# EAGLE board psas_c3 (EAGLE 7.3.0)
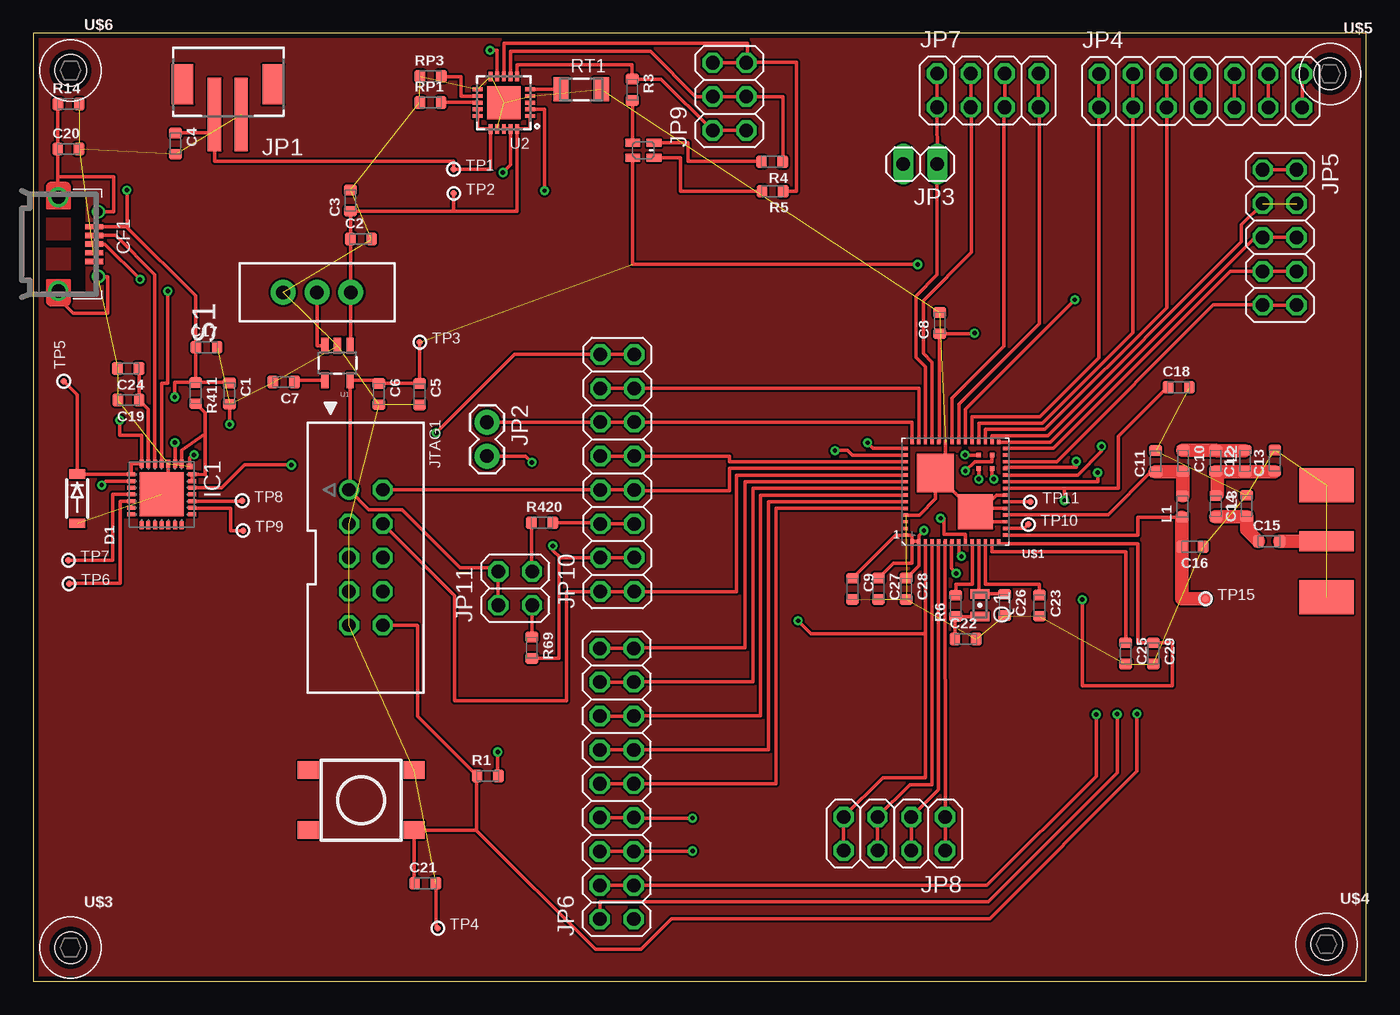
[diagram p0: board, top side]
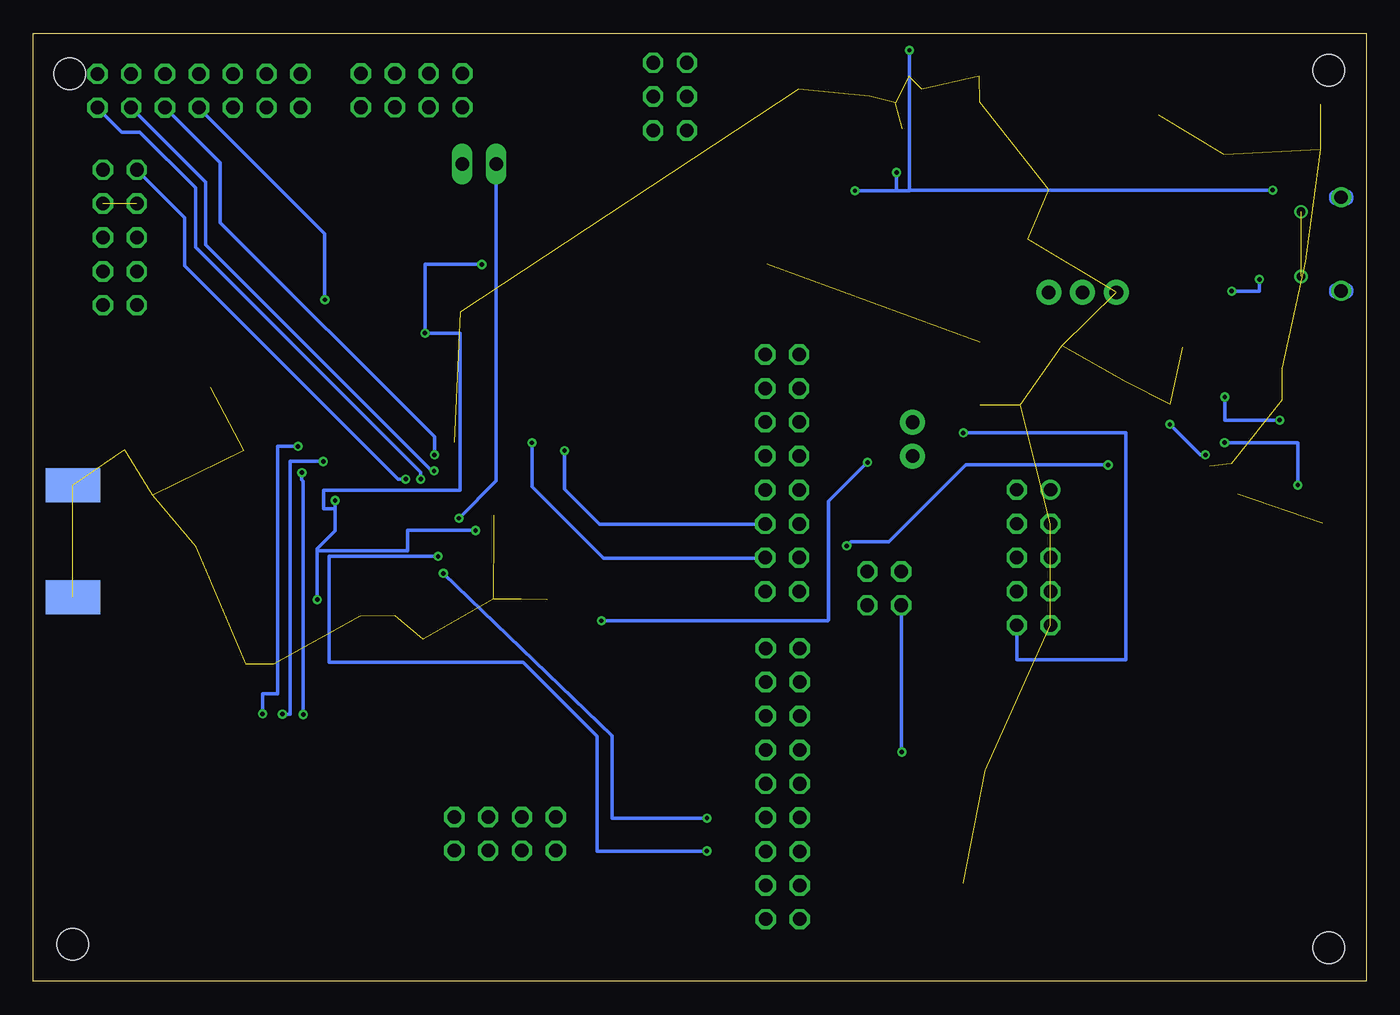
[diagram p1: board, bottom side, seen from below]

Size 100 x 71.11 mm. Coordinates in mm from the lower left corner, seen from the top.
Outline: 0,0 100,0 100,71.11 0,71.11 0,0
Copper layers (1*16): Top 0.0356mm / dielectric 1.5011mm / Bottom 0.0356mm
Design rules "LaenPCBOrder": minimum track width 6mil, minimum drill 13mil, track to track 6mil, track to pad 6mil, pad to pad 6mil, via to via 6mil, smd to smd 6mil, copper to edge 15mil, drill to drill 6mil, minimum pad ring 7mil, minimum via ring 7mil, stop-mask expansion 3mil, vias tented up to drill 0mil, thermal gap 10mil

## Footprints (pad centres in the part's own frame; a part is rotated, then mirrored left to right if it is on the bottom)
.0603-B-NOSILK = smd 0.8 x 0.95: 1 -0.8,0; 2 0.8,0
USB-MICRO-B-PTH-HIROSE = smd 0.4 x 1.35: 1 -1.3,2.675; 2 -0.65,2.675; 3 0,2.675; 4 0.65,2.675; 5 1.3,2.675 | drill 1: S1 -3.513,0; S2 3.513,0 | drill 0.65 pad 0.94: S3 2.425,3; S4 -2.425,3
SOD-123 = smd 0.7 x 1.2: ANODE 1.85,0; CATHODE -1.85,0
MLP28 = smd 0.6 x 0.3: 1 -2.3,1.5; 2 -2.3,1; 3 -2.3,0.5; 4 -2.3,0; 5 -2.3,-0.5; 6 -2.3,-1; 7 -2.3,-1.5; 15 2.3,-1.5; 16 2.3,-1; 17 2.3,-0.5; 18 2.3,0; 19 2.3,0.5; 20 2.3,1; 21 2.3,1.5 | smd 0.3 x 0.6: 8 -1.5,-2.3; 9 -1,-2.3; 10 -0.5,-2.3; 11 0,-2.3; 12 0.5,-2.3; 13 1,-2.3; 14 1.5,-2.3; 22 1.5,2.3; 23 1,2.3; 24 0.5,2.3; 25 0,2.3; 26 -0.5,2.3; 27 -1,2.3; 28 -1.5,2.3 | smd 3.3 x 3.3: EXP 0,0 | smd 0.435 x 0.435: M -2.103,2.103
SPARKFUN-CONNECTORS_JST-2-SMD-VERT = smd 1 x 5.5: GND 1,-2; VCC -1,-2 | smd 1.6 x 3: P$1 -3.4,0.27; P$2 3.4,0.27
1X02 = drill 1.016 pad 1.88: 1 0,0; 2 2.54,0
1X02' = drill 1.016 long: 1 -1.27,0; 2 1.27,0
2X07 = drill 1.016 octagon: 1 -7.62,-1.27; 2 -7.62,1.27; 3 -5.08,-1.27; 4 -5.08,1.27; 5 -2.54,-1.27; 6 -2.54,1.27; 7 0,-1.27; 8 0,1.27; 9 2.54,-1.27; 10 2.54,1.27; 11 5.08,-1.27; 12 5.08,1.27; 13 7.62,-1.27; 14 7.62,1.27
2X05 = drill 1.016 octagon: 1 -5.08,-1.27; 2 -5.08,1.27; 3 -2.54,-1.27; 4 -2.54,1.27; 5 0,-1.27; 6 0,1.27; 7 2.54,-1.27; 8 2.54,1.27; 9 5.08,-1.27; 10 5.08,1.27
2X09 = drill 1.016 octagon: 1 -10.16,-1.27; 2 -10.16,1.27; 3 -7.62,-1.27; 4 -7.62,1.27; 5 -5.08,-1.27; 6 -5.08,1.27; 7 -2.54,-1.27; 8 -2.54,1.27; 9 0,-1.27; 10 0,1.27; 11 2.54,-1.27; 12 2.54,1.27; 13 5.08,-1.27; 14 5.08,1.27; 15 7.62,-1.27; 16 7.62,1.27; 17 10.16,-1.27; 18 10.16,1.27
2X04 = drill 1.016 octagon: 1 -3.81,-1.27; 2 -3.81,1.27; 3 -1.27,-1.27; 4 -1.27,1.27; 5 1.27,-1.27; 6 1.27,1.27; 7 3.81,-1.27; 8 3.81,1.27
2X03 = drill 1.016 octagon: 1 -2.54,-1.27; 2 -2.54,1.27; 3 0,-1.27; 4 0,1.27; 5 2.54,-1.27; 6 2.54,1.27
2X08 = drill 1.016 octagon: 1 -8.89,-1.27; 2 -8.89,1.27; 3 -6.35,-1.27; 4 -6.35,1.27; 5 -3.81,-1.27; 6 -3.81,1.27; 7 -1.27,-1.27; 8 -1.27,1.27; 9 1.27,-1.27; 10 1.27,1.27; 11 3.81,-1.27; 12 3.81,1.27; 13 6.35,-1.27; 14 6.35,1.27; 15 8.89,-1.27; 16 8.89,1.27
2X02 = drill 1.016 octagon: 1 -1.27,-1.27; 2 -1.27,1.27; 3 1.27,-1.27; 4 1.27,1.27
CORTEXM3_SWD10_MOLEX = drill 1: 1 -5.08,-1.27 | drill 1 octagon: 2 -5.08,1.27; 3 -2.54,-1.27; 4 -2.54,1.27; 5 0,-1.27; 6 0,1.27; 7 2.54,-1.27; 8 2.54,1.27; 9 5.08,-1.27; 10 5.08,1.27
KINGBRITE_RGBLED_1.6X1.26 = smd 1.1 x 0.6: 1 0.8,-0.55; 2 -0.8,-0.55; 3 -0.8,0.55; 4 0.8,0.55
FC-12M = smd 0.7 x 1.4: 1 -0.85,0; 2 0.85,0
R1206 = smd 1.15 x 1.8: 1 -1.5,0; 2 1.5,0
SWITCH-SPDT = drill 1.016 pad 1.88: 1 0,2.54; 2 0,0; 3 0,-2.54
TACTILE_SWITCH_TALL = smd 1.55 x 1.3: A1 -3.975,-2.25; A2 3.975,-2.25; B1 -3.975,2.25; B2 3.975,2.25
TESTPOINT_ROUND_0.5MM = smd 0.5 x 0.5: P$1 0,0
SPARKFUN-POWERIC_SOT23-5 = smd 0.55 x 1.2: 1 -0.95,-1.3; 2 0,-1.3; 3 0.95,-1.3; 4 0.95,1.3; 5 -0.95,1.3
QFN20_4MM = smd 0.73 x 0.28: P$1 -1.965,1; P$2 -1.965,0.5; P$3 -1.965,0; P$4 -1.965,-0.5; P$5 -1.965,-1; P$11 1.965,-1; P$12 1.965,-0.5; P$13 1.965,0; P$14 1.965,0.5; P$15 1.965,1 | smd 0.28 x 0.73: P$6 -1,-1.965; P$7 -0.5,-1.965; P$8 0,-1.965; P$9 0.5,-1.965; P$10 1,-1.965; P$16 1,1.965; P$17 0.5,1.965; P$18 0,1.965; P$19 -0.5,1.965; P$20 -1,1.965 | smd 2.5 x 2.5: P$21 0,0
MKW01Z128 = smd 0.35 x 0.25: 1 -3.725,-3.25; 2 -3.725,-2.75; 3 -3.725,-2.25; 4 -3.725,-1.75; 5 -3.725,-1.25; 6 -3.725,-0.75; 7 -3.725,-0.25; 8 -3.725,0.25; 9 -3.725,0.75; 10 -3.725,1.25; 11 -3.725,1.75; 12 -3.725,2.25; 13 -3.725,2.75; 14 -3.725,3.25; 29 3.725,3.25; 30 3.725,2.75; 31 3.725,2.25; 32 3.725,1.75; 33 3.725,1.25; 34 3.725,0.75; 35 3.725,0.25; 36 3.725,-0.25; 37 3.725,-0.75; 38 3.725,-1.25; 39 3.725,-1.75; 40 3.725,-2.25; 41 3.725,-2.75; 42 3.725,-3.25 | smd 0.25 x 0.35: 15 -3.25,3.725; 16 -2.75,3.725; 17 -2.25,3.725; 18 -1.75,3.725; 19 -1.25,3.725; 20 -0.75,3.725; 21 -0.25,3.725; 22 0.25,3.725; 23 0.75,3.725; 24 1.25,3.725; 25 1.75,3.725; 26 2.25,3.725; 27 2.75,3.725; 28 3.25,3.725; 43 3.25,-3.725; 44 2.75,-3.725; 45 2.25,-3.725; 46 1.75,-3.725; 47 1.25,-3.725; 48 0.75,-3.725; 49 0.25,-3.725; 50 -0.25,-3.725; 51 -0.75,-3.725; 52 -1.25,-3.725; 53 -1.75,-3.725; 54 -2.25,-3.725; 55 -2.75,-3.725; 56 -3.25,-3.725 | smd 0.35 x 0.35: 57 1.75,1.75; 58 2.75,1.75; 59 1.75,2.75; 60 2.75,2.75 | smd 2.771 x 2.901: PGND1 -1.5,1.4 | smd 2.62 x 2.62: PGND2 1.5,-1.5
SMAJ716-ND = smd 2.54 x 4.064 bottom: GND1 4.191,0.508; GND3 -4.191,0.508 | smd 2.54 x 4.064: GND2 -4.191,0.508; GND4 4.191,0.508 | smd 1.524 x 4.064: P$3 0,0.508
#2/.750-BARE = hole 2.375: 0,0

## Placement (x,y rotation side)
C1  10uF  [.0603-B-NOSILK]  14.71,44.1 270 top
C2  100nF  [.0603-B-NOSILK]  24.58,55.68 0 top
C3  4.7uF  [.0603-B-NOSILK]  23.8,58.57 90 top
C4  4.7uF  [.0603-B-NOSILK]  10.67,62.84 270 top
C5  100nF  [.0603-B-NOSILK]  28.98,44.04 270 top
C6  4.7uF  [.0603-B-NOSILK]  25.93,44.05 270 top
C7  100nF  [.0603-B-NOSILK]  18.78,44.95 180 top
C8  100nF  [.0603-B-NOSILK]  67.99,49.38 90 top
C9  100nF  [.0603-B-NOSILK]  61.45,29.44 270 top
C10  10p  [.0603-B-NOSILK]  86.26,39.04 270 top
C11  15p  [.0603-B-NOSILK]  84.2,39.01 90 top
C12  2.2p  [.0603-B-NOSILK]  90.91,39.04 90 top
C13  15p  [.0603-B-NOSILK]  93.14,39.07 90 top
C14  8.2p  [.0603-B-NOSILK]  91.03,35.66 90 top
C15  100nF  [.0603-B-NOSILK]  92.71,33.02 0 top
C16  1nF  [.0603-B-NOSILK]  86.97,32.6 180 top
C17  1.0uF  [.0603-B-NOSILK]  12.99,47.56 0 top
C18  100nF  [.0603-B-NOSILK]  85.93,44.57 0 top
C19  0.1uF  [.0603-B-NOSILK]  7.15,43.6 180 top
C20  100nF  [.0603-B-NOSILK]  2.64,62.42 0 top
C21  1nF  [.0603-B-NOSILK]  29.41,7.37 0 top
C22  11pF  [.0603-B-NOSILK]  69.95,25.68 0 top
C23  100nF  [.0603-B-NOSILK]  75.48,28.19 270 top
C24  4.7uF  [.0603-B-NOSILK]  7.12,45.97 180 top
C25  100nF  [.0603-B-NOSILK]  81.95,24.6 270 top
C26  11pF  [.0603-B-NOSILK]  72.87,28.24 270 top
C27  100nF  [.0603-B-NOSILK]  63.41,29.45 270 top
C28  100nF  [.0603-B-NOSILK]  65.49,29.46 270 top
C29  100nF  [.0603-B-NOSILK]  84.03,24.6 270 top
CF1  CF1  [USB-MICRO-B-PTH-HIROSE]  1.88,55.3 270 top
D1  [SOD-123]  3.3,36.22 270 top
IC1  CP2102  [MLP28]  9.63,36.52 270 top
JP1  battery_connector  [SPARKFUN-CONNECTORS_JST-2-SMD-VERT]  14.6,67.02 0 top
JP2  [1X02]  34.04,41.94 270 top
JP3  [1X02']  66.55,61.3 180 top
JP4  [2X07]  87.58,66.8 0 top
JP5  [2X05]  93.51,55.8 270 top
JP6  [2X09]  43.77,14.83 90 top
JP7  [2X04]  71.61,66.84 0 top
JP8  [2X04]  64.61,11.08 180 top
JP9  [2X03]  52.23,66.36 90 top
JP10  [2X08]  43.82,38.13 90 top
JP11  [2X02]  36.15,29.49 90 top
JTAG1  [CORTEXM3_SWD10_MOLEX]  24.95,31.79 270 top
L1  22n  [.0603-B-NOSILK]  86.21,35.61 90 top
L2  15n  [.0603-B-NOSILK]  88.7,39.04 270 top
L3  15n  [.0603-B-NOSILK]  88.71,35.64 270 top
LED1  [KINGBRITE_RGBLED_1.6X1.26]  45.77,62.35 0 top
Q1  32 MHz  [FC-12M]  71.01,28.22 270 top
R1  1k  [.0603-B-NOSILK]  34.09,15.42 0 top
R3  1k  [.0603-B-NOSILK]  44.94,66.88 270 top
R4  1k  [.0603-B-NOSILK]  55.43,61.48 180 top
R5  1k  [.0603-B-NOSILK]  55.47,59.27 180 top
R6  0  [.0603-B-NOSILK]  69.21,28.17 90 top
R14  1M  [.0603-B-NOSILK]  2.64,65.81 0 top
R69  4.7k  [.0603-B-NOSILK]  37.41,25.03 270 top
R411  4.7k  [.0603-B-NOSILK]  12.18,44.13 270 top
R420  4.7k  [.0603-B-NOSILK]  38.17,34.41 0 top
RP1  5k  [.0603-B-NOSILK]  29.8,65.93 0 top
RP3  100k  [.0603-B-NOSILK]  29.8,67.89 0 top
RT1  10K (NTC)  [R1206]  41.1,66.9 0 top
S1  [SWITCH-SPDT]  21.28,51.68 90 top
S2  SWITCH-MOMENTARY-2  [TACTILE_SWITCH_TALL]  24.59,13.6 0 top
TP1  [TESTPOINT_ROUND_0.5MM]  31.53,60.91 0 top
TP2  [TESTPOINT_ROUND_0.5MM]  31.55,59.11 0 top
TP3  [TESTPOINT_ROUND_0.5MM]  29,47.95 0 top
TP4  [TESTPOINT_ROUND_0.5MM]  30.34,4 0 top
TP5  [TESTPOINT_ROUND_0.5MM]  2.29,45.02 90 top
TP6  [TESTPOINT_ROUND_0.5MM]  2.68,29.83 0 top
TP7  [TESTPOINT_ROUND_0.5MM]  2.63,31.59 0 top
TP8  [TESTPOINT_ROUND_0.5MM]  15.67,36.05 0 top
TP9  [TESTPOINT_ROUND_0.5MM]  15.73,33.82 0 top
TP10  [TESTPOINT_ROUND_0.5MM]  74.66,34.27 0 top
TP11  [TESTPOINT_ROUND_0.5MM]  74.8,35.97 0 top
TP15  [TESTPOINT_ROUND_0.5MM]  87.94,28.71 0 top
U1  MIC5219 3.3V  [SPARKFUN-POWERIC_SOT23-5]  22.82,46.38 180 top
U2  MCP73871  [QFN20_4MM]  35.3,65.91 180 top
U$1  MKW01Z128  [MKW01Z128]  69.18,36.73 0 top
U$2  SMAJ716-ND  [SMAJ716-ND]  96.52,33.02 270 top
U$3  [#2/.750-BARE]  2.79,2.54 0 top
U$4  [#2/.750-BARE]  97.03,2.79 0 top
U$5  [#2/.750-BARE]  97.28,68.07 0 top
U$6  [#2/.750-BARE]  2.79,68.33 0 top

## Library data of the parts
C1-C7 C10-C17 C19-C21 C24 L1-L3 R1 R3-R6 R14 R69 R411 R420 RP1 RP3 = rcl_custom
C8 C9 C18 C22 C23 C25-C29 = Vibrogait_prototype; DIST: Digi-Key; DPN: 490-1532-1-ND; MFG: Murata Electronics North America; MPN: GRM188R71C104KA01D
CF1 D1 JP1 LED1 RT1 S1 S2 = Vibrogait_prototype
IC1 = silabs; MF: FARNELL; MPN: CP2102-GM; OC_FARNELL: 9282130; OC_NEWARK: 30K5635
JP2 = SparkFun-v5
JP3-JP11 = pinhead
JTAG1 TP1-TP11 TP15 U2 = microbuilder
Q1 = crystal
U1 = Vibrogait_prototype; PROD_ID: VREG-09872
U$1 = psas_c3; DIST: Digi-Key; DPN: MKW01Z128CHN-ND; MFN: Freescale Semiconductor; MPN: MKW01Z128CHN
U$2 = SMAJ16-ND
U$3-U$6 = mount

## Nets
3.3V: C5.1 C6.1 C8.1 C9.1 C18.1 C27.1 C28.1 C29.1 JP11.2 JP11.4 JTAG1.1 LED1.2 R1.2 TP3.P$1 U1.5 U$1.1 U$1.19 U$1.35 U$1.43 U$1.55 U$1.56
!PG: JP9.1 JP9.2 R3.1 U2.P$6
D+: CF1.3 IC1.4
D-: CF1.2 IC1.5
DIO5/CLKOUT: JP2.2 JP8.7 JP8.8 U$1.54
GND: C1.2 C2.2 C3.2 C4.2 C5.2 C6.2 C7.2 C8.2 C9.2 C11.2 C13.2 C14.2 C16.1 C17.2 C18.2 C19.2 C20.2 C21.2 C22.2 C23.2 C24.2 C25.2 C26.2 C27.2 C28.2 C29.2 CF1.5 D1.ANODE IC1.3 IC1.EXP IC1.M JP1.GND JTAG1.3 JTAG1.5 JTAG1.9 R14.2 RP1.1 RP3.1 RT1.2 S1.1 S2.B2 TP4.P$1 U1.2 U2.P$4 U2.P$10 U2.P$11 U2.P$17 U2.P$21 U$1.2 U$1.3 U$1.4 U$1.20 U$1.36 U$1.38 U$1.40 U$1.PGND1 U$1.PGND2 U$2.GND1 U$2.GND2 U$2.GND3 U$2.GND4
N$1: C7.1 U1.4
N$2: LED1.3 R3.2
N$3: LED1.4 R4.2
N$4: LED1.1 R5.2
N$5: IC1.12 TP6.P$1
N$6: RT1.1 U2.P$5
N$7: IC1.11 TP7.P$1
N$8: S1.2 U1.3
N$9: RP1.2 U2.P$13
N$10: RP3.2 U2.P$12
N$11: IC1.24 TP8.P$1
N$12: C22.1 Q1.2 R6.1
N$13: TP10.P$1 U$1.41
N$14: C25.1 U$1.44
N$15: TP11.P$1 U$1.37
N$16: JP8.1 JP8.2 U$1.51
N$17: C12.1 C13.1 L2.2 L3.1
N$18: C10.1 C12.2 L2.1
N$19: C15.2 U$2.P$3
N$20: JP8.3 JP8.4 U$1.52
N$21: C14.1 C15.1 L3.2
N$22: C23.1 U$1.45
N$23: JP8.5 JP8.6 U$1.53
N$24: C19.1 C24.1 IC1.6
N$25: IC1.23 TP9.P$1
N$26: JP10.9 JP10.10 U$1.12
N$27: JP10.13 JP10.14 U$1.16
N$28: JP11.1 R69.1
N$29: JP11.3 R420.1
N$30: IC1.1 IC1.2 IC1.9 IC1.27 IC1.28 R411.2
N$34: C20.1 CF1.S1 CF1.S2 CF1.S3 CF1.S4 R14.1
PTA0: JP10.1 JP10.2 JTAG1.4 U$1.10
PTA1: IC1.26 JP10.3 JP10.4 R69.2 U$1.14
PTA2: JP10.5 JP10.6 R420.2 U$1.13
PTA3: JP10.7 JP10.8 JTAG1.2 U$1.11
PTA18: JP2.1 JP10.11 JP10.12 U$1.15
PTA20/!RESET: C21.1 JP10.15 JP10.16 JTAG1.10 R1.1 S2.A2 U$1.33
PTB0: JP3.1 JP7.1 JP7.2 U$1.17
PTB1: JP7.3 JP7.4 U$1.18
PTB2: JP7.5 JP7.6 U$1.21
PTB17: JP7.7 JP7.8 U$1.22
PTC1: JP4.1 JP4.2 U$1.24
PTC2: JP4.3 JP4.4 U$1.25
PTC3: JP4.5 JP4.6 U$1.26
PTC4: JP4.7 JP4.8 U$1.23
PTC5: JP4.9 JP4.10 U$1.59
PTC6: JP4.11 JP4.12 U$1.60
PTC7: JP4.13 JP4.14 U$1.57
PTD0: JP5.1 JP5.2 U$1.58
PTD4: JP5.3 JP5.4 U$1.27
PTD5: JP5.5 JP5.6 U$1.28
PTD6: JP5.7 JP5.8 U$1.29
PTD7: JP5.9 JP5.10 U$1.31
PTE0: JP6.2 U$1.32
PTE1: JP6.3 JP6.4 U$1.34
PTE2: JP6.5 JP6.6 U$1.49
PTE3: JP6.7 JP6.8 U$1.50
PTE16: JP6.9 JP6.10 U$1.5
PTE17: JP6.11 JP6.12 U$1.6
PTE18: JP6.13 JP6.14 U$1.7
PTE19: JP6.15 JP6.16 U$1.8
PTE30: JP6.17 JP6.18 U$1.9
RESET(RF): JP3.2 U$1.48
RFIO: C10.2 C11.1 L1.2 U$1.39
STAT1/LBO: JP9.5 JP9.6 R5.1 U2.P$8
STAT2: JP9.3 JP9.4 R4.1 U2.P$7
V+: C4.1 JP1.VCC TP1.P$1 U2.P$14 U2.P$15 U2.P$16
VBUS: C1.1 C17.1 CF1.1 D1.CATHODE IC1.7 IC1.8 R411.1 TP5.P$1 U2.P$2 U2.P$3 U2.P$9 U2.P$18 U2.P$19
VOUT: C2.1 C3.1 S1.3 TP2.P$1 U1.1 U2.P$1 U2.P$20
VR_PA: C16.2 L1.1 TP15.P$1 U$1.42
XTA: R6.2 U$1.47
XTB: C26.1 Q1.1 U$1.46

## Tracks (layer width: path | path; a pad name or v marks a point on that pad's centre or on a via)
3.3V  (via drill 0.33)  (1 unrouted)
  Top 0.254: U$1.55 | U$1.55 66.44,31.2 C28.1 | U$1.56 65.94,31.36 64.51,31.36 C27.1 | C9.1 64.69,33.48 U$1.1 65.94,33.48 U$1.56 | U$1.56 U$1.55 | U$1.19 67.99,40.45 C8.1 | 77.35,36.98 81.41,36.98 81.41,40.89 85.08,44.57 C18.1 | JP11.2 JP11.4 34.88,30.81 34.67,31.03 32.01,31.03 27.66,35.38 25.17,35.38 JTAG1.1 23.66,36.87 23.66,36.94 23.77,36.94 U1.5 25.93,45.08 C6.1 C5.1 28.98,47.92 TP3.P$1 | 67.93,48.53 C8.1 | U$1.55 66.44,33.42 v66.82,33.82 | C29.1 | U$1.43 72.44,32.84 82.88,32.84 82.88,25.4 C29.1 | v77.35,36.07 77.35,36.98 | R1.2 34.84,15.47 v34.84,17.21 | U$1.35 77.35,36.98 | LED1.2 44.97,53.78 v66.34,53.78 | 67.99,48.63 C8.1 | v78.7,28.64 78.7,22.2 85.47,22.2 85.47,25.4 C29.1 | C8.1 70.61,48.58 v70.61,48.63
  Bottom 0.254: 78.71,32.46 77.36,33.8 77.36,35.45 | 77.36,35.45 77.36,35.94 v77.35,36.07 | v34.84,17.21 34.88,17.26 JP11.2 | v66.34,53.78 70.61,53.78 v70.61,48.63 67.98,48.63 67.98,36.85 78.21,36.85 78.21,35.45 77.36,35.45 | v66.82,33.82 71.92,33.82 71.92,32.32 78.71,32.32 78.71,32.46 | 78.71,32.46 78.7,32.46 v78.7,28.64
!PG
  Top 0.254: JP9.1 JP9.2 47.11,67.68 R3.1 44.92,67.68 44.92,68.74 36.3,68.74 U2.P$6
D+  (via drill 0.33)
  Top 0.254: CF1.3 5.36,55.3 v8.01,52.65 | v10.09,51.77 10.09,44.87 9.62,44.87 9.62,38.82 IC1.4
  Bottom 0.254: v8.01,52.65 8.01,51.77 v10.09,51.77
D-
  Top 0.254: CF1.2 6.18,55.95 9.12,53.02 9.12,38.83 IC1.5
DIO5/CLKOUT  (via drill 0.33)
  Top 0.254: JP8.8 JP8.7 63.73,15.28 66.93,15.28 66.93,26.07 | U$1.54 66.93,26.07 | JP2.2 36.94,39.4 v37.41,38.94 | v57.38,27.05 58.36,26.07 66.93,26.07
  Bottom 0.254: v37.41,38.94 40.33,36.01 40.33,27.1 40.38,27.05 v57.38,27.05
GND  (via drill 0.33)  (51 unrouted)
  Top 0.254: TP4.P$1 30.21,4.13 C21.2 | IC1.3 10.13,37.02 IC1.EXP | IC1.M 11.73,39.29 v12.06,39.5 | v14.73,41.78 14.73,43.28 C1.2 | U$1.4 66.47,34.98 67.69,36.2 67.69,38.12 U$1.PGND1 | U$1.38 71.25,35.48 | 71.25,35.48 70.94,35.48 U$1.PGND2 | U$1.40 71.44,34.48 U$1.PGND2 | U$1.36 72.25,36.48 71.25,35.48 | U$1.PGND2 70.58,35.23 U$1.PGND1 | U$1.20 68.44,38.88 U$1.PGND1
  Bottom 0.254: v12.06,39.5 12.45,39.5 v14.73,41.78
N$1
  Top 0.254: U1.4 19.58,45.08 C7.1
N$2
  Top 0.254: R3.2 44.94,62.92 LED1.3
N$3
  Top 0.254: LED1.4 49.13,62.9 49.13,61.5 54.62,61.5 R4.2
N$4
  Top 0.254: LED1.1 48.54,61.8 48.54,59.25 54.67,59.25 R5.2
N$5
  Top 0.254: IC1.12 6.52,36.02 6.52,29.85 2.68,29.85 TP6.P$1
N$6
  Top 0.254: U2.P$5 RT1.1
N$7
  Top 0.254: IC1.11 5.97,36.52 5.97,31.58 TP7.P$1
N$8
  Top 0.254: U1.3 21.28,47.68 S1.2
N$9
  Top 0.254: U2.P$13 33.34,65.93 RP1.2
N$10
  Top 0.254: U2.P$12 32.1,66.41 32.1,67.87 30.6,67.87 RP3.2
N$11
  Top 0.254: IC1.24 15.67,36.02 TP8.P$1
N$12
  Top 0.254: C22.1 69.15,27.37 R6.1 Q1.2
  Top 0.406: 69.21,25.74 C22.1 | Q1.2
N$13
  Top 0.254: U$1.41 74.36,33.98 TP10.P$1
N$14
  Top 0.254: U$1.44 71.94,32.23 81.96,32.23 C25.1
N$15
  Top 0.254: TP11.P$1 72.91,35.97 U$1.37
N$16
  Top 0.254: JP8.2 JP8.1 68.39,33 U$1.51
N$17
  Top 0.254: 93.12,38.24 C13.1 | L2.2 88.77,38.24 88.83,38.18 | 88.83,36.55 L3.1
  Top 1.016: 93.12,38.24 C12.1 L2.2 | 88.83,38.18 88.83,36.55
N$18
  Top 0.254: L2.1 88.82,39.84 88.82,39.79 | 90.87,39.79 C12.2
  Top 1.016: C10.1 L2.1 | 88.82,39.79 90.87,39.79
N$19
  Top 1.016: C15.2 U$2.P$3
N$20
  Top 0.254: JP8.4 JP8.3 67.9,14.37 67.92,14.37 U$1.52
N$21
  Top 0.254: 91.01,34.84 C14.1
  Top 1.016: L3.2 91.01,34.84 | C14.1 91.03,33.9 C15.1
N$22
  Top 0.254: U$1.45 71.44,29.79 75.48,29.79 C23.1
N$23
  Top 0.254: JP8.6 JP8.5 65.76,14.77 67.42,14.77 67.42,33 U$1.53
N$24
  Top 0.254: IC1.6 8.63,42.91 C19.1 7.95,45.95 C24.1
N$25
  Top 0.254: IC1.23 11.93,35.49 14.82,35.49 14.82,33.8 15.73,33.8 TP9.P$1
N$26
  Top 0.254: U$1.12 52.22,38.98 52.22,39.4 JP10.9 JP10.10
N$27
  Top 0.254: JP10.14 JP10.13 66.44,44.48 U$1.16
N$28
  Top 0.254: JP11.1 37.42,25.85 R69.1
N$29
  Top 0.254: R420.1 37.37,30.82 JP11.3
N$30  (via drill 0.33)
  Top 0.254: IC1.27 IC1.28 12.38,38.02 12.88,38.01 12.88,41.06 | v10.63,40.42 IC1.2 IC1.1 11.13,39.83 12.88,41.06 | v5.13,37.23 5.42,37.52 IC1.9 | 12.88,41.06 12.88,42.64 R411.2
  Bottom 0.254: v10.63,40.42 5.13,40.42 v5.13,37.23
N$31
  pour Top: 0.13,70.99 99.82,70.99 99.82,0 0.13,0
N$34  (1 unrouted)
  Top 0.254: CF1.S2 1.88,51.26 3.01,50.13 5.6,50.13 5.6,52.87 CF1.S3 | CF1.S1 1.84,58.82 1.84,60.35 | 1.84,60.35 C20.1 R14.1 | CF1.S4 6.04,57.73 6.04,60.35 1.84,60.35
PTA0
  Top 0.254: U$1.10 65.45,37.97 65.44,37.97 | 65.44,37.97 65.44,38 | 65.44,37.97 52.77,37.97 52.77,29.23 45.11,29.23 JP10.1 JP10.2 40.02,29.24 40.02,21.04 31.62,21.04 31.62,28.93 31.61,28.93 JTAG1.4
PTA1  (via drill 0.33)
  Top 0.254: JP10.3 JP10.4 39.56,31.77 | R69.2 39.44,24.23 39.44,31.77 39.56,31.77 | IC1.26 14.13,37.02 15.85,38.74 v19.37,38.74 | U$1.14 63.01,39.98 v62.59,40.4 | v38.97,32.67 38.97,32.36 39.56,31.77
  Bottom 0.254: v62.59,40.4 62.59,37.1 57.24,31.75 45.13,31.75 JP10.3 | v19.37,38.74 30.05,38.74 35.8,32.99 38.66,32.99 v38.97,32.67
PTA2  (via drill 0.33)
  Top 0.254: R420.2 42.47,34.41 JP10.6 JP10.5 | U$1.13 61.45,39.48 61.09,39.84 60.17,39.84 v60.14,39.81
  Bottom 0.254: v60.14,39.81 60.14,36.91 57.53,34.3 45.12,34.3 JP10.5
PTA3
  Top 0.254: U$1.11 52.22,38.48 52.22,36.8 45.15,36.8 JP10.7 JP10.8 JTAG1.2
PTA18
  Top 0.254: JP2.1 JP10.12 JP10.11 65.94,41.94 U$1.15
PTA20/!RESET  (via drill 0.33)
  Top 0.254: U$1.33 78.36,37.98 80.14,39.75 v80.14,40.13 | v82.8,20.07 82.8,15.75 71.75,4.7 47.88,4.7 45.59,2.41 42.16,2.41 33.27,11.3 | 33.27,11.3 33.27,15.4 R1.1 28.83,19.88 28.83,26.67 28.79,26.71 JTAG1.10 | 33.27,11.3 33.22,11.35 S2.A2 28.57,7.41 C21.1 | JP10.15 JP10.16 36.1,47.02 v30.23,41.15
  Bottom 0.254: v80.14,40.13 81.66,40.13 81.66,21.59 82.8,21.59 v82.8,20.07 | v30.23,41.15 18.03,41.15 18.03,24.13 26.21,24.13 JTAG1.10
PTB0
  Top 0.254: JP7.2 JP7.1 JP3.1 67.8,61.29 67.8,52.99 66.21,51.39 66.21,46.83 66.94,46.11 U$1.17
PTB1
  Top 0.254: JP7.4 JP7.3 70.39,65.52 70.39,54.68 66.77,51.06 66.77,47.11 67.44,46.45 U$1.18
PTB2
  Top 0.254: JP7.6 JP7.5 72.83,65.52 72.83,47.65 68.94,43.75 U$1.21
PTB17
  Top 0.254: JP7.8 JP7.7 75.48,65.51 75.48,49.34 69.44,43.3 U$1.22
PTC1
  Top 0.254: JP4.2 JP4.1 79.96,46.79 75.51,42.34 70.44,42.34 U$1.24
PTC2
  Top 0.254: JP4.4 JP4.3 82.5,48.66 75.71,41.87 70.94,41.87 U$1.25
PTC3
  Top 0.254: JP4.6 JP4.5 85.04,50.53 75.91,41.4 71.44,41.4 U$1.26
PTC4  (via drill 0.33)
  Top 0.254: JP4.8 JP4.7 | U$1.23 69.94,42.93 v78.13,51.13
  Bottom 0.254: v78.13,51.13 78.13,56.08 JP4.7
PTC5  (via drill 0.33)
  Top 0.254: JP4.10 JP4.9 | U$1.59 69.91,39.48 v69.9,39.49
  Bottom 0.254: v69.9,39.49 69.9,40.84 85.98,56.92 85.98,61.39 JP4.9
PTC6  (via drill 0.33)
  Top 0.254: JP4.12 JP4.11 | U$1.60 71.94,38.98 70.64,38.98 v69.93,38.3
  Bottom 0.254: v69.93,38.3 70.11,38.3 87.07,55.26 87.07,59.95 JP4.11
PTC7  (via drill 0.33)
  Top 0.254: JP4.14 JP4.13 | U$1.57 v70.94,37.67
  Bottom 0.254: v70.94,37.67 70.94,38.19 87.83,55.08 87.83,59.52 92,63.69 93.36,63.69 JP4.13
PTD0  (via drill 0.33)
  Top 0.254: JP5.2 JP5.1 | U$1.58 71.94,37.79 v72.06,37.67
  Bottom 0.254: v72.06,37.67 72.63,37.67 88.64,53.69 88.64,57.28 JP5.1
PTD4  (1 unrouted)
  Top 0.254: U$1.27 71.94,40.94 76.12,40.94 90.64,55.46 90.64,56.74 JP5.3
PTD5
  Top 0.254: JP5.6 JP5.5 92.19,55.84 91.71,55.84 76.32,40.45 U$1.28
PTD6
  Top 0.254: JP5.8 JP5.7 89.83,53.26 76.55,39.98 U$1.29
PTD7
  Top 0.254: JP5.10 JP5.9 92.21,50.75 88.55,50.75 76.78,38.98 U$1.31
PTE0  (via drill 0.33)
  Top 0.254: JP6.2 42.5,5.99 71.64,5.99 81.32,15.66 v81.32,20.05 | v78.25,39 78.25,38.56 78.05,38.56 73.45,38.56 72.91,38.56 U$1.32
  Bottom 0.254: v78.25,39 80.72,39 80.72,20.05 v81.32,20.05
PTE1  (via drill 0.33)
  Top 0.254: JP6.4 JP6.3 71.55,7.21 79.74,15.4 v79.74,20.03 | v79.86,38.16 79.86,37.48 U$1.34
  Bottom 0.254: v79.74,20.03 79.75,26.38 79.75,37.51 79.86,37.62 v79.86,38.16
PTE2  (via drill 0.33)
  Top 0.254: JP6.6 JP6.5 49.46,9.75 v49.46,9.78 | U$1.49 69.44,31.88 v69.63,31.88
  Bottom 0.254: v69.63,31.88 77.8,31.88 77.8,23.94 63.24,23.94 57.71,18.41 57.71,9.78 v49.46,9.78
PTE3  (via drill 0.33)
  Top 0.254: JP6.8 JP6.7 45.04,12.24 v49.46,12.24 | U$1.50 68.87,33 68.87,30.98 v69.24,30.61
  Bottom 0.254: v69.24,30.61 56.58,18.41 56.58,12.24 v49.46,12.24
PTE16
  Top 0.254: U$1.5 55.72,35.48 55.72,14.83 JP6.9 JP6.10
PTE17
  Top 0.254: U$1.6 55.14,35.98 55.14,17.37 JP6.11 JP6.12
PTE18
  Top 0.254: U$1.7 54.57,36.48 54.57,19.92 JP6.13 JP6.14
PTE19
  Top 0.254: U$1.8 53.99,36.98 53.99,22.47 45.04,22.47 JP6.15 JP6.16
PTE30
  Top 0.254: U$1.9 53.38,37.48 53.38,25.02 45.04,25.02 JP6.17 JP6.18
RESET(RF)  (via drill 0.33)
  Top 0.254: U$1.48 69.94,33.54 68.31,33.54 68.31,34.74 v68.07,34.74
  Bottom 0.254: v68.07,34.74 65.28,37.54 JP3.2
RFIO
  Top 0.254: 83.86,38.21 80.64,35 72.93,35 U$1.39 | L1.2 86.26,36.41 | 86.26,38.21 C10.2
  Top 0.406: C11.1 83.86,38.21
  Top 1.016: 86.26,36.41 C10.2 | C11.1 86.26,38.21
STAT1/LBO
  Top 0.254: JP9.5 JP9.6 | U2.P$8 35.3,70.37 53.57,70.37 53.57,68.9 JP9.5 | R5.1 57.25,59.27 57.25,68.93 53.5,68.93 JP9.5
STAT2
  Top 0.254: U2.P$7 35.8,69.75 46.29,69.75 49.69,66.36 JP9.4 JP9.3 56.23,66.36 R4.1
V+
  Top 0.254: U2.P$14 U2.P$15 33.34,63.94 U2.P$16 34.3,60.91 TP1.P$1 31.53,61.53 13.6,61.53 13.6,63.12 13.58,63.12 13.58,65.02 JP1.VCC 13.6,63.64 C4.1
VBUS  (via drill 0.33)
  Top 0.254: TP5.P$1 3.3,44.01 D1.CATHODE 3.3,38.02 IC1.8 7.33,38.82 IC1.7 8.13,40.95 6.49,40.95 v6.49,42.09 6.49,41.84 | CF1.1 6.99,56.6 7.06,56.53 | 7.06,56.53 12.17,51.43 12.17,47.58 C17.1 12.19,44.94 R411.1 | R411.1 14.68,44.93 C1.1 | U2.P$18 U2.P$19 35.8,61.24 35.7,61.14 35.7,61.13 v35.23,60.67 | U2.P$3 U2.P$2 38.36,65.41 v38.36,59.3 | R411.1 10.61,44.93 v10.61,43.84 | U2.P$9 34.8,69.84 v34.27,69.84 | v7.01,59.35 7.06,59.3 7.06,56.53
  Bottom 0.254: v10.61,43.84 10.61,42.09 v6.49,42.09 7.88,42.09 | v35.23,60.67 35.23,59.3 | 35.23,59.3 v38.36,59.3 | v34.27,69.84 34.27,59.3 | 34.27,59.3 35.23,59.3 | 34.27,59.3 34.23,59.35 v7.01,59.35
VOUT
  Top 0.254: U1.1 23.82,47.68 S1.3 23.82,55.68 C2.1 23.8,55.68 C3.1 31.55,57.77 | 31.55,57.77 36.3,57.77 U2.P$20 37.27,63.94 U2.P$1 | TP2.P$1 31.55,57.77
VR_PA
  Top 0.254: U$1.42 82.87,33.48 82.87,34.81 L1.1 86.17,34.81
  Top 1.016: 86.17,34.81 C16.2 86.17,28.71 TP15.P$1
XTA
  Top 0.254: U$1.47 70.44,33 70.44,29.77 69.21,29.77 R6.2
XTB
  Top 0.254: U$1.46 70.94,29.07 | Q1.1 72.84,29.07 C26.1
  Top 0.406: Q1.1 70.94,29.07 | 72.87,29.07 C26.1